# Altium PCB L_radar_some_PCBs.PcbDoc (part 3 of 3)
Units mm, origin at the board's own origin, x right, y up, seen from the top; angles counter-clockwise.
Board outline 152.4 x 101.6 mm, 8 copper layers (Top Layer, Layer 5, Layer 3, Layer 1, Layer 2, Layer 4, Layer 6, Bottom Layer), stack 1.028 mm thick; 12 components, 0 nets, 0 pads, 2735 vias.
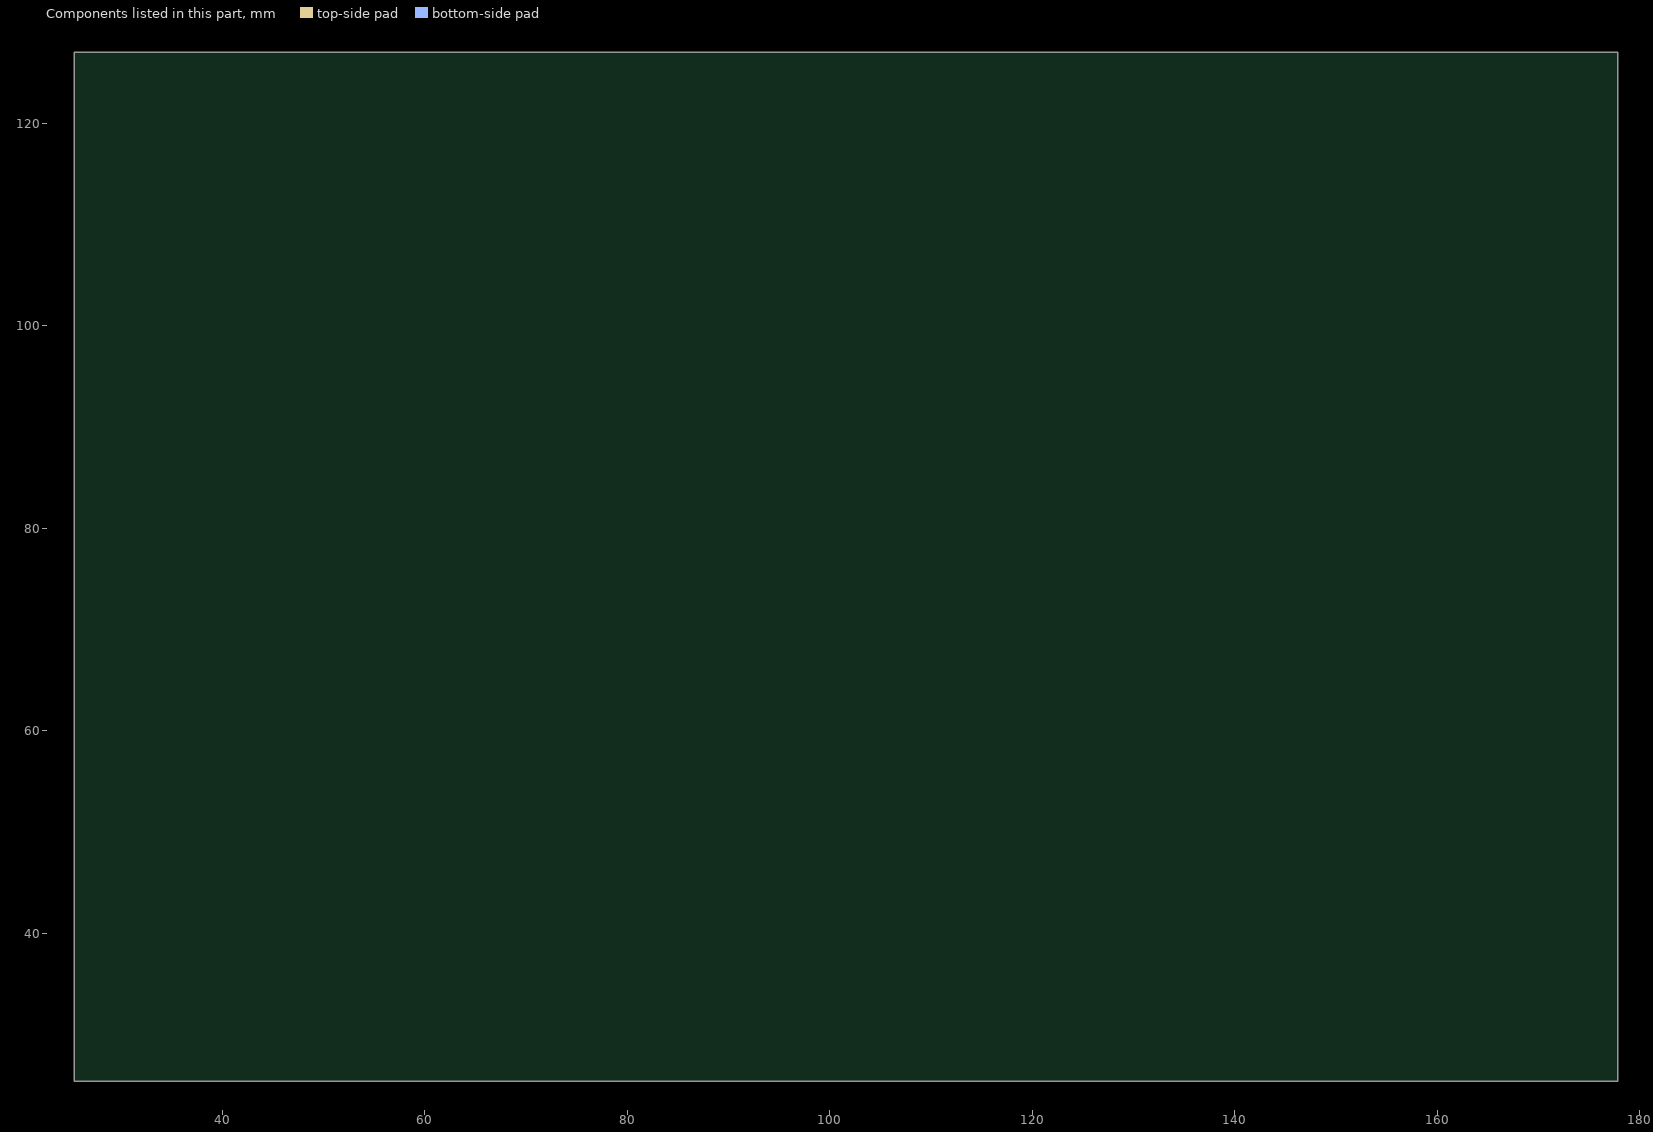
[diagram p9: the components of this part, seen from the top]

## Other copper (continued)
Layer 6:
  region: 42.547,82.24 42.547,81.941 43.795,81.941 43.795,82.24
  region: 92.508,82.239 92.508,81.94 93.756,81.94 93.756,82.239
  region: 68.791,83.64 68.492,83.64 68.492,82.392 68.791,82.392
  rectangle: 69.263,114.302 69.562,115.55
  rectangle: 120.312,71.988 145.012,121.988
  rectangle: 145.612,71.988 170.312,121.988
  region: 94.458,82.294 94.428,82.243 94.4,82.206 94.364,82.172 94.357,82.163 94.358,82.016 94.379,81.995 94.397,81.978 94.41,81.961 94.425,81.941 94.436,81.925 94.445,81.913 94.458,81.89 94.462,81.864 94.472,81.842 94.484,81.823 94.491,81.805 94.499,81.778 94.504,81.749 94.507,81.72 94.509,81.692 94.509,81.662 94.505,81.629 94.502,81.602 94.498,81.586 94.494,81.567 94.477,81.548 94.464,81.518 94.46,81.494 94.46,81.48 94.459,81.476 94.443,81.447 94.422,81.415 94.401,81.388 94.367,81.353 94.358,81.345 94.358,76.69 94.393,73.074 102.634,73.127 102.692,90.134 102.575,90.251 94.346,90.234 94.358,82.836 94.397,82.798 94.419,82.771 94.435,82.745 94.449,82.722 94.459,82.704 94.459,82.675 94.468,82.649 94.479,82.631 94.488,82.616 94.494,82.614 94.503,82.573 94.508,82.538 94.508,82.477 94.504,82.448 94.5,82.417 94.495,82.389 94.487,82.359 94.477,82.347 94.469,82.331 94.463,82.315
  region: 68.942,88.842 68.942,84.46 68.941,84.162 69.312,84.16 69.312,82.457 69.333,82.443 69.349,82.429 69.365,82.414 69.376,82.402 69.388,82.39 91.988,82.39 91.988,82.76 93.691,82.76 93.711,82.788 93.723,82.801 93.735,82.813 93.753,82.83 93.758,82.836 93.758,89.49 93.76,90.222 68.945,90.275
  region: 41.842,82.295 41.873,82.244 41.901,82.207 41.937,82.173 41.943,82.164 41.943,82.017 41.922,81.996 41.904,81.978 41.89,81.962 41.875,81.942 41.864,81.925 41.855,81.913 41.842,81.891 41.839,81.864 41.829,81.843 41.816,81.824 41.81,81.806 41.802,81.779 41.797,81.75 41.794,81.721 41.792,81.692 41.792,81.662 41.795,81.63 41.799,81.602 41.802,81.587 41.807,81.567 41.823,81.549 41.837,81.519 41.841,81.495 41.841,81.481 41.841,81.477 41.857,81.448 41.879,81.415 41.9,81.388 41.934,81.354 41.942,81.346 41.942,76.691 41.907,73.075 33.667,73.128 33.608,90.135 33.725,90.252 41.955,90.235 41.942,82.836 41.903,82.798 41.882,82.772 41.866,82.745 41.851,82.723 41.841,82.705 41.841,82.676 41.833,82.65 41.822,82.631 41.812,82.617 41.807,82.615 41.797,82.573 41.792,82.539 41.792,82.478 41.796,82.449 41.801,82.418 41.806,82.39 41.813,82.36 41.823,82.347 41.832,82.331 41.838,82.316
  region: 68.342,88.851 68.342,84.16 67.972,84.16 67.972,82.457 67.939,82.433 67.921,82.414 67.897,82.39 44.315,82.39 44.315,82.76 42.612,82.76 42.58,82.799 42.559,82.823 42.545,82.835 42.545,89.49 42.546,90.215 68.344,90.282
  region: 91.988,81.79 91.988,81.42 93.691,81.42 93.714,81.391 93.732,81.37 93.745,81.36 93.758,81.345 93.758,73.076 42.662,73.076 42.662,73.073 42.545,73.073 42.545,81.345 42.559,81.36 42.577,81.379 42.59,81.393 42.6,81.405 42.612,81.42 44.315,81.42 44.315,81.79 67.897,81.79 67.923,81.763 67.958,81.734 67.99,81.71 68.02,81.694 68.051,81.689 68.079,81.685 68.094,81.677 68.109,81.666 68.117,81.657 68.119,81.655 68.156,81.645 68.195,81.643 68.241,81.64 68.274,81.643 68.312,81.648 68.348,81.656 68.374,81.663 68.391,81.677 68.414,81.685 68.435,81.688 68.438,81.69 68.462,81.706 68.488,81.72 68.514,81.739 68.531,81.753 68.544,81.768 68.559,81.781 68.568,81.791 68.717,81.79 68.743,81.763 68.772,81.738 68.811,81.711 68.846,81.69 68.869,81.687 68.887,81.68 68.901,81.672 68.911,81.663 68.948,81.652 68.975,81.647 69.009,81.642 69.046,81.64 69.08,81.641 69.113,81.643 69.139,81.647 69.166,81.655 69.182,81.67 69.196,81.679 69.214,81.686 69.232,81.689 69.25,81.69 69.256,81.689 69.273,81.698 69.293,81.71 69.314,81.724 69.335,81.74 69.356,81.757 69.369,81.769 69.381,81.782 69.388,81.79
  region: 93.383,113.7 70.157,113.7 70.124,113.667 70.096,113.643 70.062,113.619 70.034,113.602 69.912,113.5 70.002,113.601 69.975,113.594 69.954,113.582 69.935,113.565 69.876,113.553 69.829,113.549 69.787,113.552 69.746,113.557 69.71,113.564 69.68,113.573 69.658,113.59 69.641,113.597 69.616,113.6 69.574,113.624 69.529,113.658 69.485,113.7 69.338,113.701 69.319,113.681 69.29,113.655 69.262,113.633 69.208,113.6 69.177,113.594 69.15,113.579 69.143,113.573 69.107,113.562 69.072,113.556 69.031,113.551 69.004,113.55 68.967,113.551 68.927,113.557 68.888,113.565 68.865,113.585 68.843,113.595 68.816,113.6 68.798,113.599 68.751,113.626 68.714,113.654 68.688,113.679 68.664,113.701 45.412,113.7 45.412,104.978 93.412,104.978
  region: 69.712,120.761 69.712,116.07 70.082,116.07 70.082,114.367 70.113,114.342 70.132,114.326 70.145,114.312 70.157,114.3 93.412,114.3 93.412,122.161 69.716,122.15
  region: 69.112,120.761 69.112,116.07 68.742,116.07 68.742,114.367 68.71,114.342 68.691,114.326 68.678,114.312 68.666,114.3 45.412,114.3 45.412,122.161 69.107,122.15
  region: 91.661,81.99 92.188,81.99 92.188,81.74 92.308,81.62 93.815,81.62 93.825,81.594 93.835,81.569 93.845,81.551 93.857,81.533 93.869,81.518 93.88,81.504 93.893,81.492 93.908,81.48 93.921,81.471 93.935,81.462 93.949,81.455 93.952,74.143 94.158,74.143 94.158,81.293 94.158,81.451 94.181,81.462 94.2,81.474 94.22,81.489 94.238,81.506 94.256,81.526 94.268,81.542 94.276,81.556 94.285,81.572 94.292,81.59 94.303,81.625 94.309,81.669 94.308,81.704 94.302,81.737 94.293,81.767 94.282,81.792 94.265,81.822 94.249,81.842 94.228,81.863 94.211,81.878 94.19,81.893 94.164,81.907 94.13,81.92 94.101,81.927 94.074,81.93 94.056,81.931 94.037,81.932 94.023,81.932 93.987,81.92 93.952,81.907 93.923,81.891 93.894,81.87 93.87,81.845 93.843,81.809 93.828,81.779 93.82,81.754 93.815,81.74 92.308,81.74 92.308,82.44 93.658,82.44 93.814,82.44 93.821,82.419 93.829,82.398 93.845,82.37 93.86,82.348 93.874,82.331 93.891,82.313 93.913,82.295 93.941,82.279 93.969,82.265 93.998,82.257 94.017,82.253 94.038,82.25 94.065,82.249 94.096,82.252 94.123,82.258 94.15,82.267 94.18,82.282 94.208,82.3 94.24,82.326 94.265,82.358 94.285,82.392 94.298,82.426 94.306,82.462 94.309,82.508 94.303,82.554 94.292,82.587 94.276,82.624 94.254,82.658 94.23,82.682 94.203,82.705 94.182,82.718 94.158,82.729 94.158,89.103 93.958,89.103 93.958,82.729 93.914,82.706 93.888,82.684 93.867,82.661 93.853,82.641 93.842,82.625 93.832,82.608 93.826,82.59 93.82,82.571 92.308,82.56 92.188,82.44 92.188,82.19 91.661,82.19
  region: 44.642,81.99 44.115,81.99 44.115,81.74 43.995,81.62 42.488,81.62 42.478,81.594 42.468,81.569 42.458,81.551 42.446,81.533 42.434,81.518 42.423,81.504 42.41,81.491 42.395,81.48 42.382,81.47 42.368,81.462 42.354,81.454 42.351,74.143 42.145,74.143 42.145,81.293 42.145,81.451 42.123,81.462 42.103,81.474 42.083,81.489 42.065,81.506 42.047,81.526 42.036,81.542 42.027,81.556 42.019,81.572 42.011,81.59 42,81.625 41.994,81.669 41.996,81.704 42.001,81.737 42.011,81.767 42.021,81.792 42.039,81.821 42.055,81.842 42.075,81.863 42.092,81.878 42.113,81.892 42.139,81.907 42.173,81.919 42.203,81.926 42.229,81.929 42.248,81.931 42.266,81.931 42.281,81.932 42.316,81.919 42.351,81.907 42.38,81.891 42.409,81.87 42.434,81.845 42.46,81.809 42.475,81.779 42.483,81.753 42.488,81.74 43.995,81.74 43.995,82.44 42.645,82.44 42.49,82.44 42.482,82.419 42.474,82.398 42.458,82.37 42.443,82.348 42.429,82.331 42.413,82.312 42.39,82.295 42.362,82.279 42.334,82.265 42.305,82.257 42.286,82.252 42.266,82.25 42.239,82.249 42.207,82.252 42.18,82.258 42.154,82.266 42.123,82.281 42.095,82.3 42.064,82.326 42.038,82.358 42.019,82.392 42.006,82.425 41.997,82.462 41.994,82.507 42.001,82.554 42.011,82.587 42.027,82.624 42.05,82.657 42.073,82.681 42.1,82.704 42.121,82.718 42.145,82.729 42.145,89.098 42.345,89.098 42.345,82.729 42.389,82.706 42.415,82.684 42.437,82.66 42.45,82.641 42.461,82.624 42.472,82.608 42.478,82.59 42.483,82.571 43.995,82.56 44.115,82.44 44.115,82.19 44.642,82.19
  region: 68.742,89.169 68.742,83.96 68.992,83.96 69.112,83.84 69.112,82.333 69.139,82.323 69.163,82.313 69.182,82.303 69.2,82.291 69.215,82.279 69.228,82.268 69.241,82.255 69.253,82.24 69.262,82.227 69.27,82.213 69.278,82.199 91.661,82.19 91.661,81.99 69.44,81.99 69.282,81.991 69.271,81.968 69.259,81.948 69.244,81.928 69.226,81.91 69.206,81.892 69.19,81.881 69.177,81.872 69.161,81.864 69.142,81.856 69.107,81.845 69.063,81.839 69.028,81.841 68.996,81.846 68.965,81.856 68.94,81.866 68.911,81.884 68.89,81.9 68.869,81.92 68.854,81.937 68.84,81.958 68.825,81.984 68.813,82.018 68.806,82.048 68.803,82.074 68.801,82.093 68.801,82.111 68.801,82.126 68.813,82.161 68.826,82.196 68.842,82.225 68.863,82.254 68.887,82.279 68.924,82.305 68.954,82.32 68.979,82.328 68.992,82.333 68.992,83.84 68.292,83.84 68.292,82.49 68.292,82.335 68.313,82.327 68.334,82.319 68.363,82.303 68.385,82.288 68.401,82.274 68.42,82.258 68.437,82.236 68.453,82.207 68.467,82.179 68.475,82.15 68.48,82.131 68.482,82.111 68.483,82.084 68.481,82.052 68.475,82.026 68.466,81.999 68.451,81.968 68.432,81.94 68.406,81.909 68.375,81.883 68.34,81.864 68.307,81.851 68.271,81.842 68.225,81.839 68.178,81.846 68.145,81.856 68.108,81.873 68.075,81.895 68.051,81.918 68.028,81.945 68.014,81.966 68.003,81.99 44.642,81.99 44.642,82.19 68.003,82.19 68.026,82.234 68.048,82.26 68.072,82.282 68.092,82.296 68.108,82.306 68.125,82.317 68.143,82.323 68.161,82.328 68.172,83.84 68.292,83.96 68.542,83.96 68.542,89.169
  region: 69.512,121.079 69.512,115.87 69.762,115.87 69.882,115.75 69.882,114.243 69.908,114.233 69.933,114.223 69.951,114.213 69.969,114.201 69.984,114.189 69.998,114.178 70.01,114.165 70.022,114.15 70.031,114.137 70.04,114.123 70.047,114.109 92.431,114.1 92.431,113.9 70.209,113.9 70.051,113.9 70.04,113.878 70.028,113.858 70.013,113.838 69.996,113.82 69.976,113.802 69.96,113.791 69.946,113.782 69.93,113.773 69.912,113.766 69.877,113.755 69.833,113.749 69.798,113.751 69.765,113.756 69.735,113.765 69.71,113.776 69.68,113.793 69.66,113.809 69.639,113.83 69.624,113.847 69.609,113.868 69.595,113.894 69.582,113.928 69.575,113.958 69.572,113.984 69.571,114.003 69.57,114.021 69.57,114.036 69.582,114.071 69.595,114.106 69.611,114.135 69.632,114.164 69.657,114.188 69.693,114.215 69.723,114.23 69.748,114.238 69.762,114.243 69.762,115.75 69.062,115.75 69.062,114.4 69.062,114.244 69.083,114.237 69.104,114.229 69.132,114.213 69.154,114.198 69.171,114.184 69.189,114.168 69.207,114.145 69.223,114.117 69.237,114.089 69.245,114.06 69.249,114.041 69.252,114.02 69.253,113.994 69.25,113.962 69.244,113.935 69.235,113.909 69.22,113.878 69.202,113.85 69.176,113.819 69.144,113.793 69.11,113.773 69.076,113.76 69.04,113.752 68.994,113.749 68.948,113.755 68.915,113.766 68.878,113.782 68.844,113.805 68.82,113.828 68.797,113.855 68.784,113.876 68.773,113.9 46.368,113.9 46.368,114.1 68.773,114.1 68.796,114.144 68.818,114.17 68.841,114.192 68.861,114.205 68.877,114.216 68.894,114.226 68.912,114.232 68.931,114.238 68.942,115.75 69.062,115.87 69.312,115.87 69.312,121.079
Bottom Layer:
  rectangle: 93.836,73.171 94.266,74.371
  region: 94.27,90.294 93.84,90.294 93.84,88.875 94.27,88.875
  region: 42.467,74.371 42.037,74.371 42.037,73.171 42.467,73.171
  rectangle: 42.033,88.862 42.463,90.294
  rectangle: 68.423,88.931 68.853,90.131
  region: 93.416,113.782 93.416,114.212 92.216,114.212 92.216,113.782
  region: 46.616,113.784 46.616,114.214 45.416,114.214 45.416,113.784
  rectangle: 69.192,120.841 69.622,122.041
  region: 170.312,96.773 170.312,97.203 169.112,97.203 169.112,96.773
  region: 121.512,96.773 121.512,97.203 120.312,97.203 120.312,96.773
  rectangle: 145.097,71.988 145.527,73.188
  rectangle: 145.097,120.788 145.527,121.988
  region: 41.995,81.692 41.995,81.684 ccw(c42.251,81.684) 42.251,81.429 ccw(c42.251,81.67) 42.492,81.67 42.492,81.688 ccw(c42.251,81.688) 42.251,81.929 42.248,81.929 ccw(c42.248,81.677) 41.996,81.677 41.996,81.674
  region: 41.999,82.51 41.999,82.502 ccw(c42.254,82.502) 42.254,82.247 ccw(c42.254,82.488) 42.495,82.488 42.495,82.506 ccw(c42.254,82.506) 42.254,82.747 42.252,82.747 ccw(c42.252,82.495) 42,82.495 42,82.492
  region: 93.805,81.689 93.805,81.681 ccw(c94.06,81.681) 94.06,81.426 ccw(c94.06,81.667) 94.301,81.667 94.301,81.685 ccw(c94.06,81.685) 94.06,81.926 94.058,81.926 ccw(c94.058,81.674) 93.806,81.674 93.806,81.671
  region: 93.805,82.506 93.805,82.498 ccw(c94.06,82.498) 94.06,82.243 ccw(c94.06,82.484) 94.301,82.484 94.301,82.502 ccw(c94.06,82.502) 94.06,82.743 94.058,82.743 ccw(c94.058,82.491) 93.806,82.491 93.806,82.488
  region: 67.977,82.1 67.977,82.092 ccw(c68.232,82.092) 68.232,81.837 ccw(c68.232,82.078) 68.473,82.078 68.473,82.095 ccw(c68.232,82.095) 68.232,82.336 68.23,82.336 ccw(c68.23,82.084) 67.978,82.084 67.978,82.082
  region: 68.798,82.1 68.798,82.092 ccw(c69.053,82.092) 69.053,81.837 ccw(c69.053,82.078) 69.294,82.078 69.294,82.095 ccw(c69.053,82.095) 69.053,82.336 69.051,82.336 ccw(c69.051,82.084) 68.799,82.084 68.799,82.082
  region: 68.743,114.007 68.743,113.999 ccw(c68.998,113.999) 68.998,113.744 ccw(c68.998,113.985) 69.239,113.985 69.239,114.003 ccw(c68.998,114.003) 68.998,114.244 68.996,114.244 ccw(c68.996,113.992) 68.744,113.992 68.744,113.989
  region: 69.571,114.012 69.571,114.004 ccw(c69.826,114.004) 69.826,113.749 ccw(c69.826,113.99) 70.067,113.99 70.067,114.007 ccw(c69.826,114.007) 69.826,114.248 69.824,114.248 ccw(c69.824,113.996) 69.572,113.996 69.572,113.993
  region: 69.826,114.246
  region: 69.882,114.243
  region: 33.667,73.128 41.908,73.061 41.871,81.538 41.852,81.595 41.845,81.642 41.845,81.668 41.845,82.29 41.844,82.514 41.848,82.562 41.86,82.615 41.874,82.646 41.888,82.685 41.919,82.739 41.953,82.778 41.997,82.816 42.038,82.844 42.072,82.862 42.113,82.88 42.153,82.892 42.207,82.901 42.249,82.9 42.288,82.899 42.335,82.892 42.373,82.878 42.406,82.867 42.438,82.851 42.452,82.845 42.473,82.829 42.545,88.69 41.945,88.69 41.955,90.235 33.587,90.193
  region: 68.992,82.49 68.992,83.96 68.941,84.162 68.943,88.776 68.341,88.774 68.344,90.282 42.546,90.215 42.473,82.829 42.499,82.808 42.519,82.79 42.542,82.767 42.56,82.743 42.58,82.717 42.6,82.685 42.613,82.658 42.625,82.625 42.635,82.601 42.64,82.577 42.645,82.44 42.645,81.74 42.646,81.705 42.646,81.676 42.645,81.656 42.641,81.62 68.232,81.69 68.183,81.695 68.152,81.697 68.116,81.707 68.078,81.719 68.049,81.734 68.027,81.749 67.996,81.769 67.965,81.791 67.934,81.823 67.91,81.853 67.882,81.9 67.863,81.937 67.849,81.975 67.841,82.005 67.835,82.034 67.834,82.058 67.831,82.083 67.833,82.117 67.836,82.151 67.843,82.183 67.849,82.209 67.857,82.23 67.867,82.256 67.877,82.278 67.892,82.304 67.907,82.324 67.921,82.343 67.939,82.362 67.957,82.383 68.006,82.422 68.038,82.44 68.078,82.458 68.121,82.476 68.161,82.486 68.208,82.49 68.292,82.49 68.992,82.49 68.992,83.96 68.941,84.162
  region: 93.658,82.44 68.992,82.49 69.071,82.488 69.113,82.483 69.153,82.475 69.194,82.463 69.228,82.449 69.27,82.428 69.295,82.408 69.323,82.386 69.345,82.361 69.372,82.33 69.392,82.304 69.407,82.278 69.421,82.246 69.435,82.215 69.445,82.177 69.45,82.143 69.453,82.102 69.453,82.065 69.448,82.031 69.442,81.998 69.43,81.956 69.411,81.914 69.385,81.869 69.352,81.827 69.315,81.789 69.278,81.762 69.249,81.744 69.22,81.731 69.186,81.715 69.158,81.707 69.12,81.699 68.842,81.69
  region: 94.432,82.642 94.401,82.707 94.366,82.755 94.327,82.797 94.287,82.828 94.245,82.855 94.2,82.876 94.162,82.887 94.128,82.895 94.09,82.899 94.038,82.9 93.998,82.896 93.963,82.89 93.927,82.879 93.89,82.863 93.858,82.848 93.828,82.829 93.791,82.8 93.769,82.778 93.751,82.757 93.728,82.728 93.709,82.695 93.693,82.664 93.679,82.631 93.67,82.599 93.663,82.571 93.663,82.56 93.659,82.535 93.658,82.44 68.992,82.49 68.992,83.96 68.941,84.162 68.948,89.802 68.945,90.275 93.76,90.222 93.758,88.69 94.358,88.69 94.346,90.234
  region: 93.658,82.44 93.658,81.74 93.658,81.662 93.663,81.62 93.672,81.57 93.693,81.52 93.709,81.486 93.73,81.451 93.748,81.426 93.774,81.401 93.81,81.364 93.841,81.345 93.883,81.322 93.926,81.302 93.966,81.29 94.007,81.282 94.056,81.281 94.105,81.283 94.126,81.286 94.158,81.293 94.158,74.574 93.759,74.574 93.758,73.076 42.545,73.073 42.543,74.547 41.769,74.543 41.717,81.929 41.892,81.485 41.916,81.453 41.934,81.424 41.959,81.397 41.992,81.371 42.028,81.345 42.072,81.319 42.123,81.3 42.167,81.29 42.212,81.282 42.249,81.281 42.291,81.282 42.336,81.289 42.392,81.305 42.426,81.321 42.474,81.356 42.524,81.393 42.551,81.424 42.574,81.458 42.601,81.5 42.62,81.542 42.632,81.572 42.641,81.62 68.442,81.69 68.842,81.69 69.078,81.689
  region: 102.692,90.251 94.346,90.234 94.432,82.642 94.44,82.614 94.453,82.579 94.457,82.545 94.458,81.68 94.454,81.634 94.448,81.588 94.437,81.549 94.424,81.516 94.406,81.483 94.386,81.452 94.362,81.418 94.337,81.392 94.311,81.371 94.287,81.352 94.257,81.333 94.218,81.313 94.189,81.303 94.158,81.293 94.158,74.574 94.38,74.574 94.393,73.074 102.634,73.127
  region: 69.408,113.6 69.002,113.6 68.947,113.604 68.889,113.616 68.851,113.629 68.813,113.645 68.789,113.662 68.752,113.688 68.707,113.727 68.68,113.76 68.656,113.8 68.634,113.841 68.614,113.9 68.603,113.946 68.601,113.979 68.601,114.009 68.603,114.037 68.606,114.059 68.609,114.076 68.614,114.1 46.739,114.103 46.738,113.704 45.412,113.7 45.412,104.978 69.412,104.978
  region: 68.909,122.146 68.942,114.395 68.891,114.385 68.852,114.372 68.816,114.353 68.765,114.323 68.731,114.294 68.698,114.26 68.676,114.233 68.657,114.202 68.64,114.169 68.628,114.143 68.614,114.1 46.739,114.103 46.738,114.297 45.412,114.3 45.412,122.161
  region: 69.712,120.751 69.702,122.144 93.412,122.161 93.412,114.301 70.157,114.3 70.128,114.325 70.11,114.341 70.093,114.353 70.081,114.364 69.882,114.395 69.062,114.4 68.942,114.395 68.909,122.146 69.112,122.15 69.112,120.751
  region: 69.762,114.4 69.882,114.395 70.082,114.367 70.106,114.345 70.137,114.319 70.157,114.3 93.412,114.301 92.012,114.3 92.012,113.7 93.412,113.7 93.412,104.978 69.412,104.978 69.408,113.601 69.612,113.6 69.792,113.6 69.849,113.601 69.893,113.605 69.925,113.614 69.959,113.624 69.986,113.634 70.008,113.647 70.035,113.66 70.057,113.676 70.084,113.697 70.111,113.724 70.127,113.74 70.138,113.754 70.149,113.769 70.163,113.789 70.175,113.812 70.192,113.848 70.209,113.9 70.217,113.935 70.222,113.967 70.223,114.01 70.22,114.053 70.209,114.1 70.195,114.145 70.176,114.189 70.149,114.231 70.12,114.268 70.083,114.306 70.048,114.33 70.014,114.351 69.986,114.366 69.941,114.385 69.893,114.396 69.846,114.401 69.813,114.402 69.785,114.401
  region: 121.812,97.313 121.812,96.663 120.312,96.663 120.312,71.988 144.987,71.988 144.987,73.488 145.637,73.488 145.637,71.989 145.637,71.988 170.312,71.988 170.312,96.663 168.812,96.663 168.812,97.313 170.312,97.313 170.312,121.988 145.637,121.988 145.637,120.489 145.636,120.488 144.987,120.488 144.987,121.988 120.312,121.988 120.312,97.313 120.313,97.312 121.812,97.312
  pour cut-out: 145.012,121.988

## Silkscreen, mask and mechanical layers (free items; w line width, h text height)
Bottom Overlay:
  text "2" at 78.839,107.13 h8
  text "2" at 168.758,81.712 h8
  text "2" at 78.075,74.736 h8
Top Solder:
  rectangle: 45.412,106.959 51.74,120.929
  rectangle: 62.37,115.799 76.34,122.149
  rectangle: 87.033,107.061 93.383,121.031
  rectangle: 35.306,73.076 49.276,79.426
  rectangle: 35.204,83.871 49.174,90.221
  rectangle: 61.608,83.934 75.578,90.284
  rectangle: 87.027,73.076 100.997,79.426
  rectangle: 87.129,83.871 101.099,90.221
  rectangle: 138.29,115.748 152.26,122.098
  rectangle: 120.396,89.967 126.746,103.937
  rectangle: 138.392,71.882 152.362,78.232
  rectangle: 163.995,90.081 170.345,104.051
Bottom Solder:
  rectangle: 45.412,106.959 51.74,120.929
  rectangle: 62.37,115.799 76.34,122.149
  rectangle: 87.033,107.061 93.383,121.031
  rectangle: 87.027,73.076 100.997,79.426
  rectangle: 35.306,73.076 49.276,79.426
  rectangle: 35.204,83.871 49.174,90.221
  rectangle: 61.608,83.934 75.578,90.251
  rectangle: 87.129,83.871 101.099,90.221
  rectangle: 138.392,71.882 152.362,78.232
  rectangle: 163.995,90.081 170.345,104.051
  rectangle: 138.29,115.748 152.26,122.098
  rectangle: 120.396,89.967 126.746,103.937
Mechanical 6:
  region: 107.759,87.554